# Altium PCB BAT_board.PcbDoc
Units mm, origin at the board's own origin, x right, y up, seen from the top; angles counter-clockwise.
Board outline 19.56 x 17.27 mm, 2 copper layers (Top Layer, Bottom Layer); 6 components, 14 nets, 62 pads, 78 vias.
Unrouted connection lines stored in the file: 8.
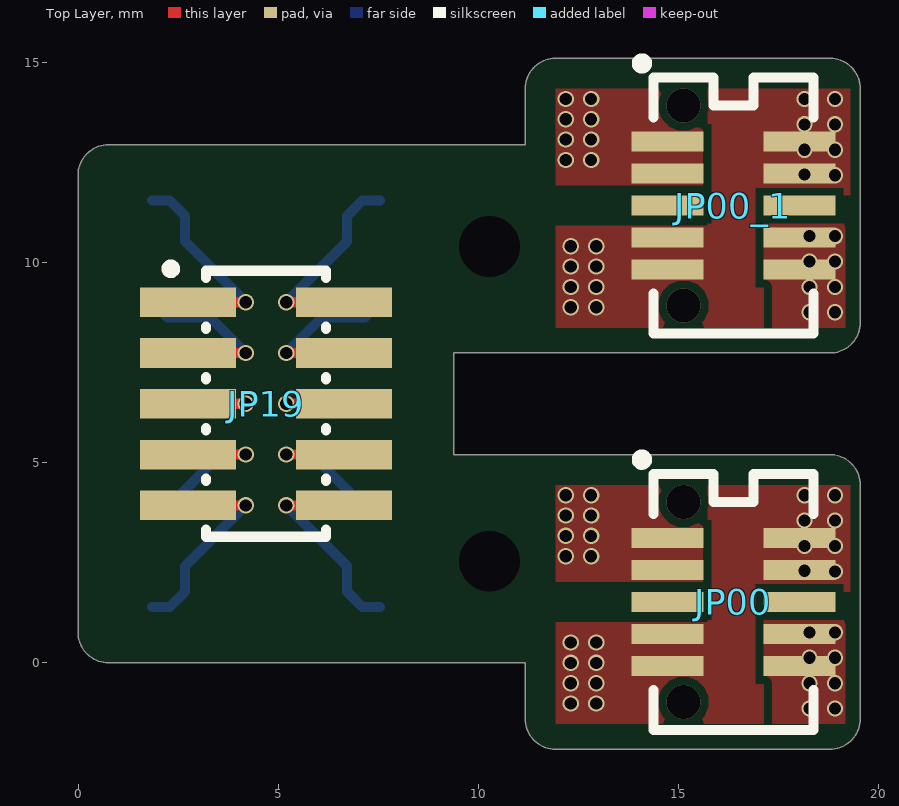
[diagram p0: Top Layer view]
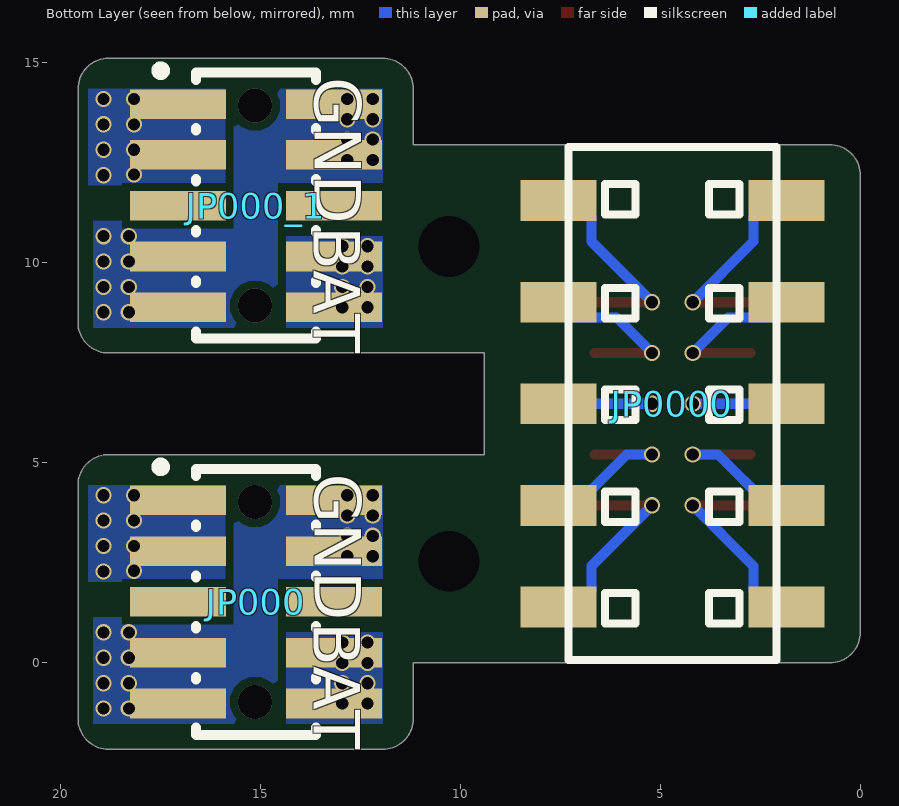
[diagram p1: Bottom Layer view, seen from below]

## Layer stack, top to bottom
Top Solder: solder mask 0.0102, Solder Resist, Dk 3.5
Top Layer: signal copper 0.0356
Dielectric 1: dielectric 0.32, FR-4, Dk 4.8
Bottom Layer: signal copper 0.0356
Bottom Solder: solder mask 0.0102, Solder Resist, Dk 3.5

## Board outline
0.762,0 cw(c0.762,0.762) 0,0.762 0,12.192 cw(c0.762,12.192) 0.762,12.954 11.176,12.954 11.176,14.351 cw(c11.938,14.351) 11.938,15.113 18.796,15.113 cw(c18.796,14.351) 19.558,14.351 19.558,8.509 cw(c18.796,8.509) 18.796,7.747 9.398,7.747 9.398,5.207 18.796,5.207 cw(c18.796,4.445) 19.558,4.445 19.558,-1.397 cw(c18.796,-1.397) 18.796,-2.159 11.938,-2.159 cw(c11.938,-1.397) 11.176,-1.397 11.176,0

## Design rules (kind name [scope] priority, off if disabled: settings)
Clearance [All] p1: gap=0.203 ignorepadtopadclearanceinfootprint=FALSE except(0: Arc-Hole Track-Hole SMDPad-Hole THPad-Hole Via-Hole Fill-Hole Poly-Hole Region-Hole Text-Hole)
PolygonConnect [All] p1: connectstyle=Relief reliefconductorwidth=0.254 reliefentries=4 polygonreliefangle="90 Angle" airgapwidth=0.254
RoutingVias [All] p1: holewidth=0.711 width=1.27 viastyle="Through Hole" minholewidth=0.711 minwidth=1.27 maxholewidth=0.711 maxwidth=1.27
SolderMaskExpansion [All] p1: expansion=0.102 istentingtop=FALSE
Width [All] p1: maxlimit=0.203 minlimit=0.203 preferedwidth=0.203
30 further rules are at their usual default settings.

## Components (designator, comment, footprint, x,y, rotation, side; value= is the part's Value field where it differs from the comment)
JP00 "Header 5*2" BTB-0.8MM-SMD-BM-2*5PIN 16.383,1.524 r0 top
JP000 "Header 5X2" HDR1.27-M-LS-2x5P#1 15.113,1.524 r270 bottom
JP0000 "Header 5X2" HDR2.54-M-LS-2x5P 4.699,6.477 r270 bottom
JP000_1 "Header 5X2" HDR1.27-M-LS-2x5P#1 15.113,11.43 r270 bottom locked (schematic designator JP000)
JP00_1 "Header 5*2" BTB-0.8MM-SMD-BM-2*5PIN 16.383,11.43 r0 top (schematic designator JP00)
JP19 "Header 5X2" HDR1.27-M-LS-2x5P#2 4.699,6.477 r270 top

## Footprints (in the part's own frame and the unit in brackets; to place one, negate y for a bottom-side part, rotate by r counter-clockwise, add the part's x,y. Pads: shape width x height; smd on the part's side, far side on the other; paste and mask are expansions set on the pad)
BTB-0.8MM-SMD-BM-2*5PIN [mm] "0.8侧插板对板公座，10PIN"
  rect 1.8x0.5 smd: 1(-1.65,1.6) 2(1.65,1.6) 3(-1.65,0.8) 4(1.65,0.8) 5(-1.65,0) 6(1.65,0) 7(-1.65,-0.8) 8(1.65,-0.8) 9(-1.65,-1.6) 10(1.65,-1.6)
  silkscreen extent -2.41,-3.2 2,3.68, body extent -2.16,-2.88 2.05,2.88, height 3.61
HDR1.27-M-LS-2x5P#1 [mm] "脚距：1.27mm，贴片双排母"
  rect 0.74x2.4 smd: 1(-2.54,-1.95) 3(-1.27,-1.95) 5(0,-1.95) 6(0,1.95) 7(1.27,-1.95) 9(2.54,-1.95)
  rect 0.74x2.4 smd mask+0.102: 2(-2.54,1.95) 4(-1.27,1.95) 8(1.27,1.95) 10(2.54,1.95)
  silkscreen extent -3.48,-2.49 3.33,1.5, body extent -3.18,-2.75 3.18,2.75, height 5.5
HDR1.27-M-LS-2x5P#2 [mm] "脚距：1.27mm，贴片双排母"
  rect 0.74x2.4 smd: 1(-2.54,-1.95) 2(-2.54,1.95) 3(-1.27,-1.95) 4(-1.27,1.95) 5(0,-1.95) 6(0,1.95) 7(1.27,-1.95) 8(1.27,1.95) 9(2.54,-1.95) 10(2.54,1.95)
  silkscreen extent -3.48,-2.48 3.33,1.5, body extent -3.18,-2.75 3.18,2.75, height 5.5
HDR2.54-M-LS-2x5P [mm] "脚距：2.54mm，贴片双排母"
  rect 1.02x1.9 smd: 1(-5.08,2.85) 2(-5.08,-2.85) 3(-2.54,2.85) 4(-2.54,-2.85) 5(0,2.85) 6(0,-2.85) 7(2.54,2.85) 8(2.54,-2.85) 9(5.08,2.85) 10(5.08,-2.85)
  silkscreen extent -6.42,-2.6 6.41,2.6, body extent -6.38,-3.2 6.38,3.2, height 5.15

## Part data
JP00 JP00_1: "BTB Connector"
JP000 JP0000 JP000_1 JP19: "5*2P接插件", BOM名称=5*2P接插件, 学习资源=https://shop463601444.taobao.com, 版权归属="封装库来自淘宝 ID：黄晶宝石"

## Free pads (board coordinates)
  round 1.27 hole 1.524 unplated: 2(10.287,10.414) 2(10.287,2.54)

## Via types
v1: diameter 0.406, hole 0.305, Top Layer to Bottom Layer, tented both sides, 74 vias
v2: diameter 0.85, hole 0.85, Top Layer to Bottom Layer, 4 vias

## Nets (pads, with @x,y where several pads share a name; then routed paths per layer and width w, separated by ;. In a path a pad name is that pad's centre, name@x,y a point inside that pad or via, vN(x,y) a via of type N, cw(c..) or ccw(c..) an arc to the next point about the centre after c; other vN are vias at no path point)
GND: JP000.1 JP00.2 JP000.3 JP00.4 JP00.7 JP000.8 JP00.9 JP000.10 JP000_1.1 JP00_1.2 JP000_1.3 JP00_1.4 JP00_1.7 JP000_1.8 JP00_1.9 JP000_1.10
  other v1: 12.319,-1.016 12.954,-1.016 12.319,-0.508 12.954,-0.508 12.319,0 12.954,0 12.319,0.508 12.954,0.508 18.923,2.286 18.161,2.3 18.161,2.921 18.923,2.921 18.161,3.556 18.923,3.556 18.161,4.191 18.923,4.191 12.319,8.89 12.954,8.89 12.319,9.398 12.954,9.398 12.319,9.906 12.954,9.906 12.319,10.414 12.954,10.414 18.923,12.192 18.161,12.206 18.161,12.827 18.923,12.827 18.161,13.462 18.923,13.462 18.161,14.097 18.923,14.097
NetJP0000_1: JP0000.1 JP19.1 | length 5.2
  Top Layer w0.254: JP19.1 v1(4.191,9.017)
  Bottom Layer w0.254: JP0000.1 2.289,11.557 2.672,11.174 2.672,10.536 v1(4.191,9.017)
NetJP0000_2: JP0000.2 JP19.2 | length 5.2
  Top Layer w0.254: v1(5.207,9.017) JP19.2
  Bottom Layer w0.254: v1(5.207,9.017) 6.726,10.536 6.726,11.174 7.109,11.557 JP0000.2
NetJP0000_3: JP0000.3 JP19.3 | length 4.3
  Top Layer w0.254: JP19.3 v1(4.191,7.747)
  Bottom Layer w0.254: JP0000.3 2.232,8.634 3.304,8.634 v1(4.191,7.747)
NetJP0000_4: JP0000.4 JP19.4 | length 4.3
  Top Layer w0.254: v1(5.207,7.747) JP19.4
  Bottom Layer w0.254: v1(5.207,7.747) 6.094,8.634 7.166,8.634 JP0000.4
NetJP00_5: JP00.5 JP000.6 JP00_1.5 JP000_1.6
NetJP000_5: JP000.5 JP00.6 JP000_1.5 JP00_1.6
NetJP0000_5: JP0000.5 JP19.5 | length 3.8
  Top Layer w0.254: JP19.5 v1(4.191,6.477)
  Bottom Layer w0.254: JP0000.5 v1(4.191,6.477)
NetJP0000_6: JP0000.6 JP19.6 | length 3.8
  Top Layer w0.254: v1(5.207,6.477) JP19.6
  Bottom Layer w0.254: v1(5.207,6.477) JP0000.6
NetJP0000_7: JP0000.7 JP19.7 | length 4.3
  Top Layer w0.254: JP19.7 v1(4.191,5.207)
  Bottom Layer w0.254: JP0000.7 2.289,3.937 3.559,5.207 v1(4.191,5.207)
NetJP0000_8: JP0000.8 JP19.8 | length 4.3
  Top Layer w0.254: v1(5.207,5.207) JP19.8
  Bottom Layer w0.254: v1(5.207,5.207) 5.842,5.207 6.726,4.323 6.726,4.32 7.109,3.937 JP0000.8
NetJP0000_9: JP0000.9 JP19.9 | length 5.2
  Top Layer w0.254: JP19.9 v1(4.191,3.937)
  Bottom Layer w0.254: JP0000.9 2.289,1.397 2.672,1.78 2.672,2.418 v1(4.191,3.937)
NetJP0000_10: JP0000.10 JP19.10 | length 5.2
  Top Layer w0.254: v1(5.207,3.937) JP19.10
  Bottom Layer w0.254: v1(5.207,3.937) 6.726,2.418 6.726,1.78 7.109,1.397 JP0000.10
VBAT: JP00.1 JP000.2 JP00.3 JP000.4 JP000.7 JP00.8 JP000.9 JP00.10 JP00_1.1 JP000_1.2 JP00_1.3 JP000_1.4 JP000_1.7 JP00_1.8 JP000_1.9 JP00_1.10
  other v1: 18.288,-1.143 18.923,-1.143 18.288,-0.508 18.923,-0.508 18.288,0.127 18.923,0.127 18.288,0.762 18.923,0.762 12.192,2.667 12.827,2.667 12.192,3.175 12.827,3.175 12.192,3.683 12.827,3.683 12.192,4.191 12.827,4.191 18.288,8.763 18.923,8.763 18.288,9.398 18.923,9.398 18.288,10.033 18.923,10.033 18.288,10.668 18.923,10.668 12.192,12.573 12.827,12.573 12.192,13.081 12.827,13.081 12.192,13.589 12.827,13.589 12.192,14.097 12.827,14.097
copper on no net:
  other v2: 15.133,-0.976 15.133,4.024 15.133,8.93 15.133,13.93

## Polygon pours and split planes (outlines as drawn)
GND on Bottom Layer "GND_L02_P009" (solid, pour order 9): 15.875,14.351 15.875,11.938 19.304,11.938 19.304,14.351
GND on Bottom Layer "GND_L02_P008" (solid, pour order 8): 11.938,10.668 11.938,8.382 14.351,8.382 14.351,10.668
VBAT on Bottom Layer "VBAT_L02_P007" (solid, pour order 7): 11.938,14.351 11.938,11.938 14.351,11.938 14.351,8.382 19.177,8.382 19.177,11.049 15.875,11.049 15.875,14.351
GND on Bottom Layer "GND_L02_P002" (solid, pour order 2): 15.875,4.445 15.875,2.032 19.304,2.032 19.304,4.445
GND on Bottom Layer "GND_L02_P001" (solid, pour order 1): 11.938,0.762 11.938,-1.524 14.351,-1.524 14.351,0.762
VBAT on Bottom Layer "VBAT_L02_P000" (solid, pour order 0): 11.938,4.445 11.938,2.032 14.351,2.032 14.351,-1.524 19.177,-1.524 19.177,1.143 15.875,1.143 15.875,4.445
VBAT on Top Layer "VBAT_L01_P012" (solid, pour order 12): 15.621,11.938 11.938,11.938 11.938,14.351 15.621,14.351
VBAT on Top Layer "VBAT_L01_P011" (solid, pour order 11): 17.145,11.049 17.145,8.382 19.177,8.382 19.177,11.049
GND on Top Layer "GND_L01_P010" (solid, pour order 10): 11.938,8.382 17.145,8.382 17.145,11.684 19.304,11.684 19.304,14.351 15.748,14.351 15.748,10.922 11.938,10.922
VBAT on Top Layer "VBAT_L01_P006" (solid, pour order 6): 15.621,2.032 11.938,2.032 11.938,4.445 15.621,4.445
VBAT on Top Layer "VBAT_L01_P005" (solid, pour order 5): 17.145,1.143 17.145,-1.524 19.177,-1.524 19.177,1.143
GND on Top Layer "GND_L01_P004" (solid, pour order 4): 11.938,-1.524 17.145,-1.524 17.145,1.778 19.304,1.778 19.304,4.445 15.748,4.445 15.748,1.016 11.938,1.016

## Silkscreen, mask and mechanical layers (free items; w line width, h text height)
Bottom Overlay:
  text "GND" at 14.03,14.636 h2 r90
  text "BAT" at 14.047,10.921 h2 r90
  text "GND" at 14.03,4.73 h2 r90
  text "BAT" at 14.047,1.015 h2 r90
Mechanical 1:
  lines w0.254: 0,0.762 ccw(c0.762,0.762) 0.762,0 9.398,0 11.176,0 11.176,-1.397 ccw(c11.938,-1.397) 11.938,-2.159 18.796,-2.159 ccw(c18.796,-1.397) 19.558,-1.397 19.558,4.445 ccw(c18.796,4.445) 18.796,5.207 9.398,5.207 9.398,7.747 18.796,7.747 ccw(c18.796,8.509) 19.558,8.509 19.558,14.351 ccw(c18.796,14.351) 18.796,15.113 11.938,15.113 ccw(c11.938,14.351) 11.176,14.351 11.176,12.954 9.398,12.954 0.762,12.954 ccw(c0.762,12.192) 0,12.192 0,0.762